# EAGLE board BatebitControllerShield_Sem_LEDs_v0.1.1 (EAGLE 8.2.1)
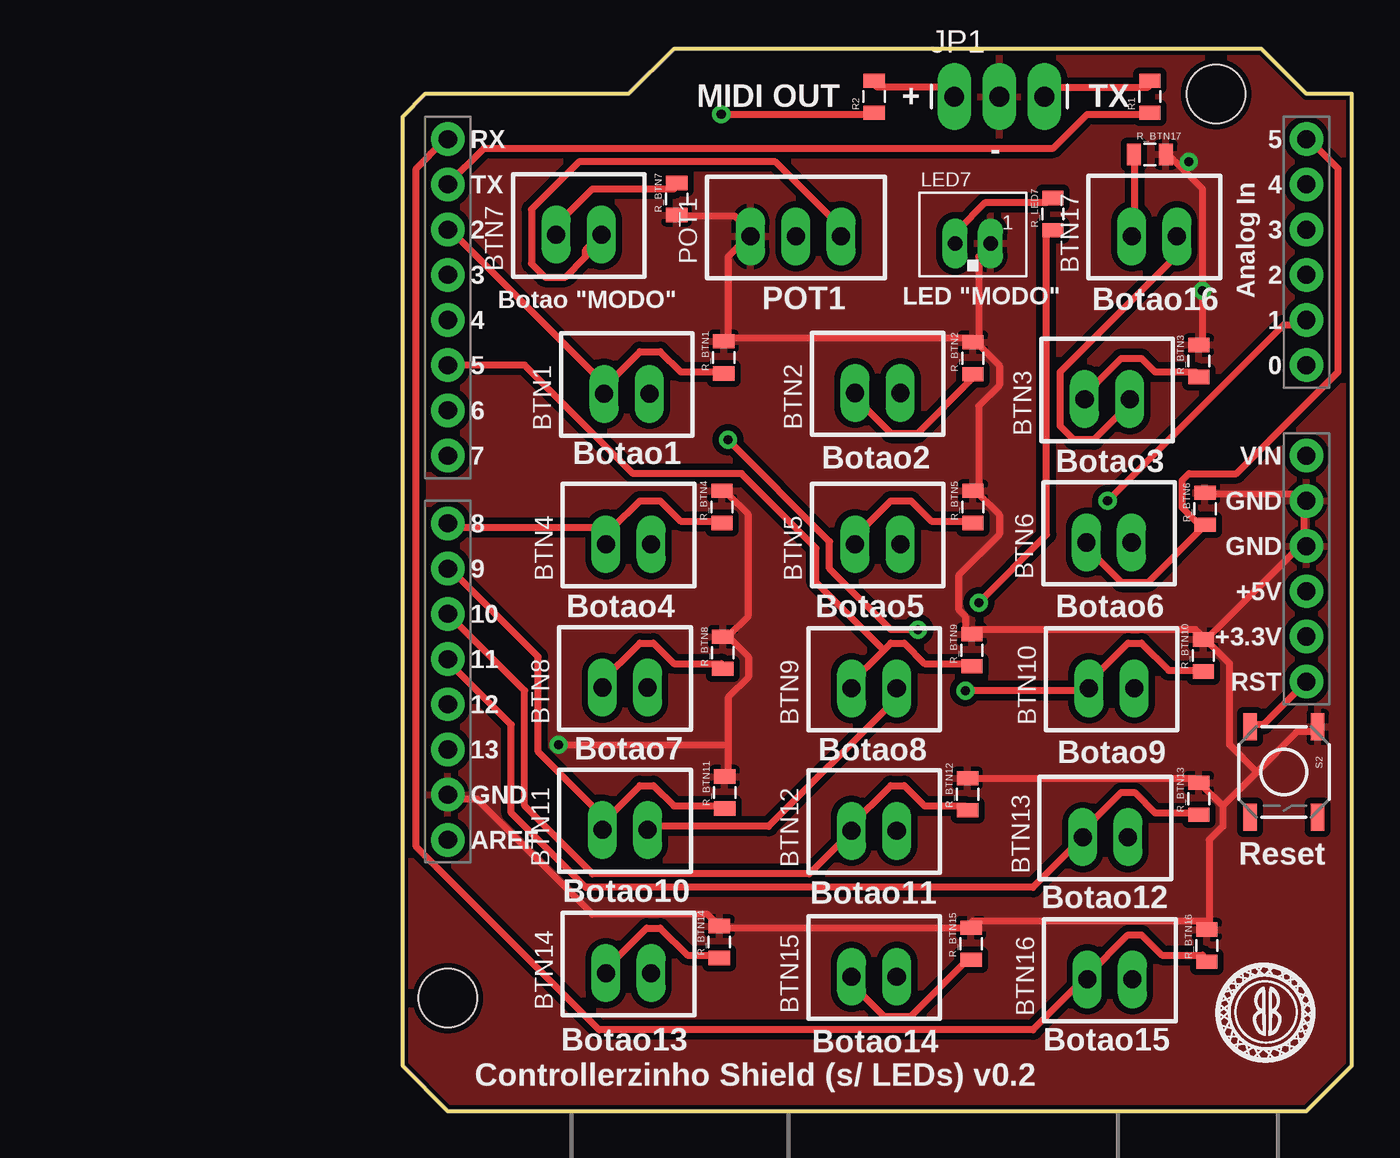
[diagram p0: board, top side]
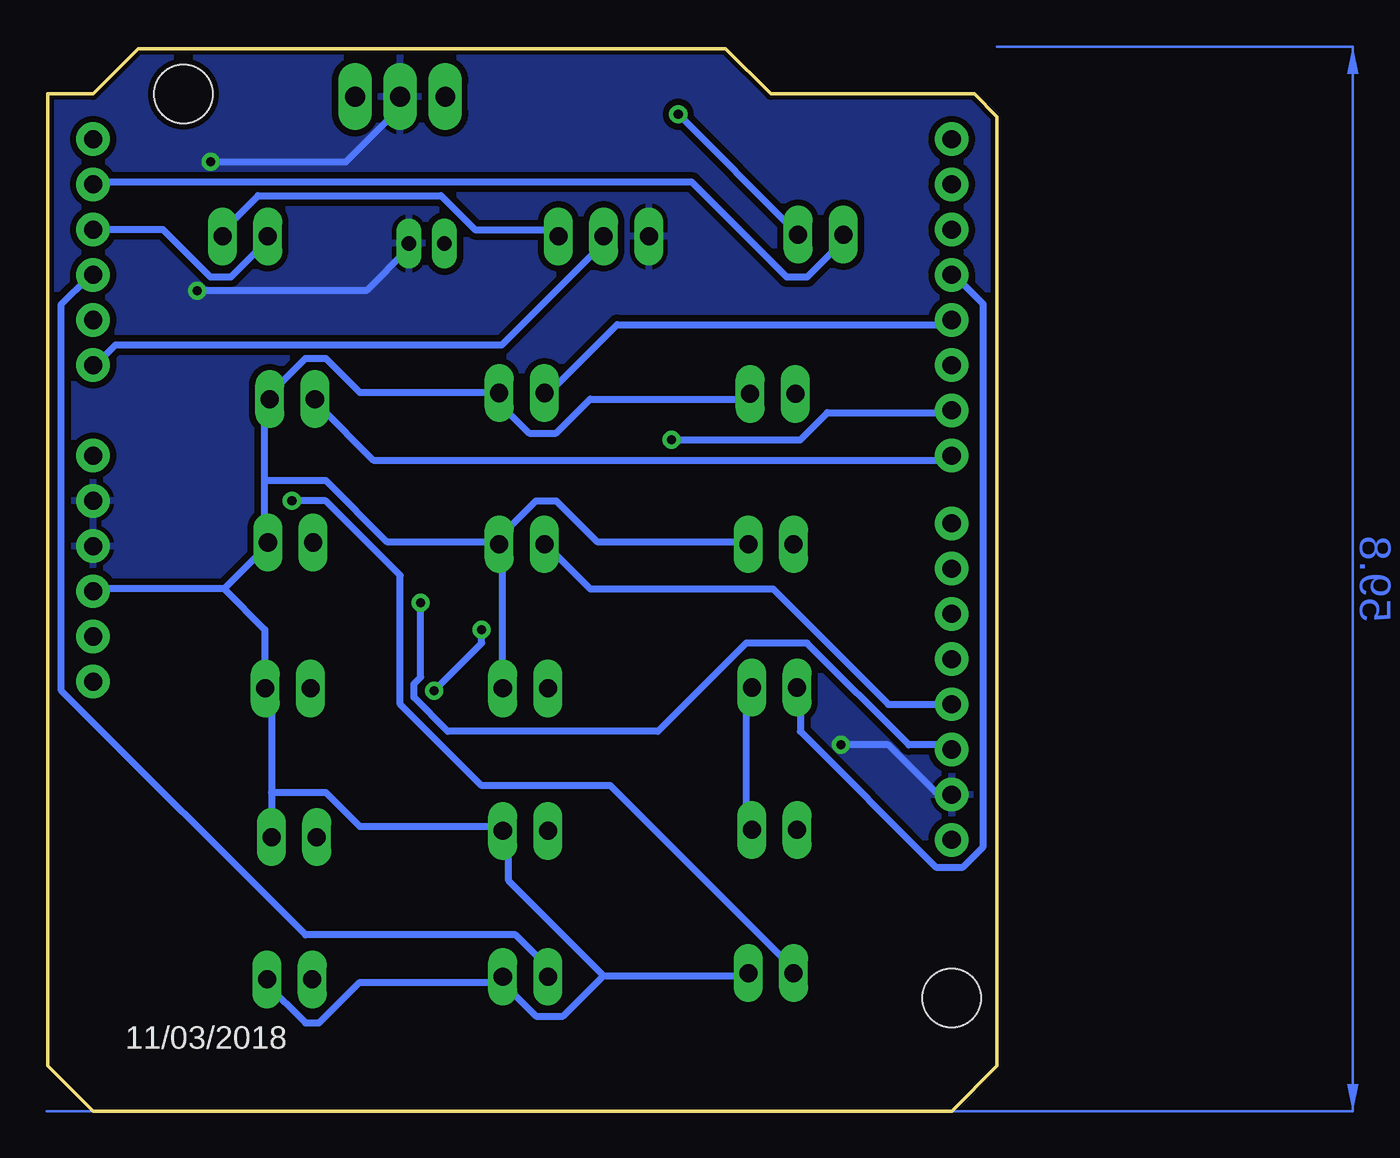
[diagram p1: board, bottom side, seen from below]

Size 53.34 x 59.69 mm. Coordinates in mm from the lower left corner, seen from the top.
Outline: 0,55.88 1.27,57.15 12.7,57.15 15.24,59.69 48.26,59.69 50.8,57.15 53.34,57.15 53.34,2.54 50.8,0 2.54,0 0,2.54 0,55.88
Copper layers (1*16): Top 0.035mm / dielectric 1.5mm / Bottom 0.035mm
Design rules "SparkFun *": minimum track width 8mil, minimum drill 20mil, track to track 8mil, track to pad 8mil, pad to pad 8mil, via to via 8mil, smd to smd 8mil, copper to edge 9mil, drill to drill 7mil, minimum pad ring 12mil, minimum via ring 10mil, stop-mask expansion 4mil, vias tented up to drill 20mil, thermal gap 10mil
Net classes: 0 default: width 0.406 mm, clearance 0.356 mm

## Footprints (pad centres in the part's own frame; a part is rotated, then mirrored left to right if it is on the bottom)
METALTEX-PEMC1-2-PACKAGE-LONG-PAD = drill 1.016 long: 1 -1.27,0; 2 1.27,0
1X03_LONGPADS = drill 1.118 pad 1.88 long: 1 0,0; 2 2.54,0; 3 5.08,0
METALTEX-PHMC4-2-PACKAGE-LONG-PAD = drill 0.8 long: P1 1,-0.5; P2 -1,-0.5
METALTEX-PEMC1-3-PACKAGE-LONG-PAD = drill 1.016 long: 1 -2.54,-0.5; 2 0,-0.5; 3 2.54,-0.5
0805 = smd 0.8 x 1.2: 1 -0.9,0; 2 0.9,0
TACTILE_SWITCH_SMD = smd 1.524 x 0.762: 1 -2.54,1.905; 2 2.54,1.905; 3 -2.54,-1.905; 4 2.54,-1.905
DUEMILANOVE_SHIELD = drill 1.016 pad 1.88: 3.3V 50.8,26.67; 5V 50.8,29.21; A0 50.8,41.91; A1 50.8,44.45; A2 50.8,46.99; A3 50.8,49.53; A4 50.8,52.07; A5 50.8,54.61; AREF 2.54,15.24; D2 2.54,49.53; D3 2.54,46.99; D4 2.54,44.45; D5 2.54,41.91; D6 2.54,39.37; D7 2.54,36.83; D8 2.54,33.02; D9 2.54,30.48; D10 2.54,27.94; D11 2.54,25.4; D12 2.54,22.86; D13 2.54,20.32; GND@0 50.8,31.75; GND@1 50.8,34.29; GND@2 2.54,17.78; RES 50.8,24.13; RX 2.54,54.61; TX 2.54,52.07; VIN 50.8,36.83 | hole 3.302: 45.72,57.15; 2.54,6.35

## Placement (x,y rotation side)
BTN1  METALTEX-PEMC1-2  [METALTEX-PEMC1-2-PACKAGE-LONG-PAD]  12.6,40.3 0 top
BTN2  METALTEX-PEMC1-2  [METALTEX-PEMC1-2-PACKAGE-LONG-PAD]  26.7,40.35 0 top
BTN3  METALTEX-PEMC1-2  [METALTEX-PEMC1-2-PACKAGE-LONG-PAD]  39.6,40 0 top
BTN4  METALTEX-PEMC1-2  [METALTEX-PEMC1-2-PACKAGE-LONG-PAD]  12.7,31.85 0 top
BTN5  METALTEX-PEMC1-2  [METALTEX-PEMC1-2-PACKAGE-LONG-PAD]  26.7,31.85 0 top
BTN6  METALTEX-PEMC1-2  [METALTEX-PEMC1-2-PACKAGE-LONG-PAD]  39.7,31.95 0 top
BTN7  METALTEX-PEMC1-2  [METALTEX-PEMC1-2-PACKAGE-LONG-PAD]  9.9,49.25 0 top
BTN8  METALTEX-PEMC1-2  [METALTEX-PEMC1-2-PACKAGE-LONG-PAD]  12.5,23.8 0 top
BTN9  METALTEX-PEMC1-2  [METALTEX-PEMC1-2-PACKAGE-LONG-PAD]  26.5,23.75 0 top
BTN10  METALTEX-PEMC1-2  [METALTEX-PEMC1-2-PACKAGE-LONG-PAD]  39.85,23.75 0 top
BTN11  METALTEX-PEMC1-2  [METALTEX-PEMC1-2-PACKAGE-LONG-PAD]  12.5,15.8 0 top
BTN12  METALTEX-PEMC1-2  [METALTEX-PEMC1-2-PACKAGE-LONG-PAD]  26.5,15.75 0 top
BTN13  METALTEX-PEMC1-2  [METALTEX-PEMC1-2-PACKAGE-LONG-PAD]  39.5,15.4 0 top
BTN14  METALTEX-PEMC1-2  [METALTEX-PEMC1-2-PACKAGE-LONG-PAD]  12.7,7.75 0 top
BTN15  METALTEX-PEMC1-2  [METALTEX-PEMC1-2-PACKAGE-LONG-PAD]  26.5,7.55 0 top
BTN16  METALTEX-PEMC1-2  [METALTEX-PEMC1-2-PACKAGE-LONG-PAD]  39.75,7.4 0 top
BTN17  METALTEX-PEMC1-2  [METALTEX-PEMC1-2-PACKAGE-LONG-PAD]  42.25,49.15 0 top
JP1  [1X03_LONGPADS]  31,57 0 top
LED7  METALTEX-PHMC4-2  [METALTEX-PHMC4-2-PACKAGE-LONG-PAD]  32.05,49.25 0 top
POT1  METALTEX-PEMC1-3  [METALTEX-PEMC1-3-PACKAGE-LONG-PAD]  22.1,49.65 0 top
R1  [0805]  42,57 90 top
R2  [0805]  26.5,57 90 top
R_BTN1  [0805]  18.05,42.35 90 top
R_BTN2  [0805]  32.05,42.3 90 top
R_BTN3  [0805]  44.75,42.15 90 top
R_BTN4  [0805]  17.95,33.95 90 top
R_BTN5  [0805]  32.05,33.95 90 top
R_BTN6  [0805]  45.1,33.85 90 top
R_BTN7  [0805]  15.4,51.25 90 top
R_BTN8  [0805]  18,25.75 90 top
R_BTN9  [0805]  32,25.9 90 top
R_BTN10  [0805]  45,25.6 90 top
R_BTN11  [0805]  18.1,17.9 90 top
R_BTN12  [0805]  31.75,17.8 90 top
R_BTN13  [0805]  44.75,17.55 90 top
R_BTN14  [0805]  17.8,9.5 90 top
R_BTN15  [0805]  31.95,9.4 90 top
R_BTN16  [0805]  45.2,9.3 90 top
R_BTN17  [0805]  42,53.75 0 top
R_LED7  [0805]  36.55,50.4 90 top
S2  Reset  [TACTILE_SWITCH_SMD]  49.53,19.05 270 top
U2  ARDUINO_SHIELD  [DUEMILANOVE_SHIELD]  0,0 0 top
U$1  BATEBITP  [BATEBIT_BRASAO_P]  45.5,2.5 0 top
U$2  BATEBITMED  [BATEBIT_MED]  26.5,23 0 bottom
U$3  CREATIVE_COMMONS  [CREATIVE_COMMONS]  28.41,25.96 0 top

## Library data of the parts
BTN1-BTN17 JP1 LED7 POT1 R1 R2 R_BTN1-R_BTN17 R_LED7 U$1 U$2 = Batebit
S2 U2 U$3 = SparkFun

## Nets
ARST: S2.3 U2.RES
BTN1: BTN1.1 R_BTN1.1 U2.D2
BTN2: BTN2.1 R_BTN2.1 U2.D4
BTN3: BTN3.1 R_BTN3.1 U2.D7
BTN4: BTN4.1 R_BTN4.1 U2.D8
BTN5: BTN5.1 R_BTN5.1 U2.D12
BTN6: BTN6.1 R_BTN6.1 U2.A5
BTN7: BTN8.1 R_BTN8.1 U2.D3
BTN8: BTN9.1 R_BTN9.1 U2.D5
BTN9: BTN10.1 R_BTN10.1 U2.D6
BTN10: BTN11.1 R_BTN11.1 U2.D9
BTN11: BTN12.1 R_BTN12.1 U2.D10
BTN12: BTN13.1 R_BTN13.1 U2.D11
BTN13: BTN14.1 R_BTN14.1 U2.A1
BTN14: BTN15.1 R_BTN15.1 U2.A2
BTN15: BTN17.1 R_BTN17.1 U2.A3
BTN16: BTN16.1 R_BTN16.1 U2.RX
GND: JP1.2 LED7.P1 POT1.1 R_BTN1.2 R_BTN2.2 R_BTN3.2 R_BTN4.2 R_BTN5.2 R_BTN6.2 R_BTN7.1 R_BTN8.2 R_BTN9.2 R_BTN10.2 R_BTN11.2 R_BTN12.2 R_BTN13.2 R_BTN14.2 R_BTN15.2 R_BTN16.2 R_BTN17.2 S2.1 U2.GND@0 U2.GND@1 U2.GND@2
LED: LED7.P2 R_LED7.2
LED_MODE_BTN: R_LED7.1 U2.D13
MODE_BTN: BTN7.1 R_BTN7.2 U2.A4
N$19: JP1.1 R2.2
N$20: JP1.3 R1.2
N$21: R1.1 U2.TX
POT1: POT1.2 U2.A0
VCC: BTN1.2 BTN2.2 BTN3.2 BTN4.2 BTN5.2 BTN6.2 BTN7.2 BTN8.2 BTN9.2 BTN10.2 BTN11.2 BTN12.2 BTN13.2 BTN14.2 BTN15.2 BTN16.2 BTN17.2 POT1.3 R2.1 U2.5V

## Tracks (layer width: path | path; a pad name or v marks a point on that pad's centre or on a via)
ARST
  Top 0.406: U2.RES 48.39,21.72 47.62,21.72 S2.3
BTN1
  Top 0.406: 11.43,40.77 11.05,40.39 BTN1.1 11.43,40.77 | 11.43,40.77 13.34,42.67 14.48,42.67 15.62,41.53 17.91,41.53 R_BTN1.1 | 11.43,40.77 2.67,49.53 U2.D2
BTN2
  Top 0.406: R_BTN2.1 32,41.15 28.96,38.1 27.43,38.1 25.53,40.01 BTN2.1
  Bottom 0.406: U2.D4 2.67,44.2 21.34,44.2 25.15,40.39 BTN2.1
BTN3
  Top 0.406: R_BTN3.1 44.58,41.53 42.29,41.53 41.53,42.29 40.39,42.29 38.1,40.01 BTN3.1
  Bottom 0.406: U2.D7 2.67,36.58 35.05,36.58 38.1,39.62 BTN3.1
BTN4
  Top 0.406: 11.81,32.77 11.43,32.38 BTN4.1 11.81,32.77 | 11.81,32.77 13.34,34.29 14.48,34.29 15.62,33.15 17.91,33.15 R_BTN4.1 | 11.81,32.77 2.67,32.77 U2.D8
BTN5
  Top 0.406: R_BTN5.1 32,33.15 29.72,33.15 28.57,34.29 27.43,34.29 25.15,32 BTN5.1
  Bottom 0.406: U2.D12 6.1,22.86 12.57,29.34 22.86,29.34 25.15,31.62 BTN5.1
BTN6
  Top 0.406: 44.96,32.77 41.91,29.72 40.39,29.72 38.48,31.62 BTN6.1 | 44.96,32.77 43.81,33.91 43.81,35.43 44.2,35.81 46.86,35.81 52.58,41.53 52.58,52.96 51.05,54.48 U2.A5 | 44.96,32.77 R_BTN6.1
BTN7
  Top 0.406: R_BTN8.1 17.91,25.15 15.24,25.15 14.1,26.29 13.34,26.29 11.05,24 BTN8.1
  Bottom 0.406: U2.D3 2.29,46.86 0.76,45.34 0.76,14.86 1.91,13.72 3.43,13.72 11.05,21.34 11.05,23.62 BTN8.1
BTN8
  Top 0.406: 27.05,25.91 25.15,24 BTN9.1 | 27.05,25.91 27.43,26.29 28.19,26.29 29.34,25.15 31.62,25.15 R_BTN9.1 | U2.D5 6.86,41.91 12.95,35.81 19.05,35.81 23.24,31.62 23.24,29.72 27.05,25.91
BTN9  (via drill 0.51)
  Top 0.406: R_BTN10.1 44.96,24.77 43.05,24.77 41.53,26.29 40.77,26.29 38.48,24 BTN10.1 38.48,23.62 v31.62,23.62 | v18.29,37.72 24,32 24,30.48 27.43,27.05 v28.96,27.05
  Bottom 0.406: v18.29,37.72 11.05,37.72 9.53,39.24 2.67,39.24 U2.D6 | v28.96,27.05 28.96,26.29 v31.62,23.62
BTN10
  Top 0.406: 11.43,16.38 11.05,16 BTN11.1 11.43,16.38 | 11.43,16.38 13.34,18.29 14.1,18.29 15.24,17.14 17.91,17.14 R_BTN11.1 | 11.43,16.38 7.62,20.19 7.62,25.53 2.67,30.48 U2.D9
BTN11
  Top 0.406: R_BTN12.1 31.62,17.14 29.34,17.14 28.19,18.29 27.43,18.29 25.15,16 BTN12.1 25.15,15.62 22.86,13.34 10.67,13.34 6.86,17.14 6.86,23.62 U2.D10
BTN12
  Top 0.406: R_BTN13.1 44.58,16.76 42.29,16.76 41.15,17.91 40.39,17.91 38.1,15.62 BTN13.1 38.1,15.24 35.43,12.57 10.29,12.57 6.1,16.76 6.1,21.72 2.67,25.15 U2.D11
BTN13  (via drill 0.51)
  Top 0.406: R_BTN14.1 17.53,8.76 16,8.76 14.48,10.29 13.72,10.29 11.43,8 BTN14.1 | v39.62,34.29 49.53,44.2 50.67,44.2 U2.A1
  Bottom 0.406: v39.62,34.29 37.72,34.29 33.53,30.1 33.53,22.86 28.96,18.29 21.72,18.29 11.43,8 BTN14.1
BTN14
  Top 0.406: R_BTN15.1 31.62,8.38 28.57,5.33 27.05,5.33 25.15,7.24 BTN15.1
  Bottom 0.406: U2.A2 51.05,46.86 52.58,45.34 52.58,23.62 38.86,9.91 27.05,9.91 25.53,8.38 25.53,7.62 BTN15.1
BTN15
  Top 0.406: R_BTN17.1 41.15,53.72 41.15,49.53 BTN17.1
  Bottom 0.406: U2.A3 46.86,49.53 44.2,46.86 43.05,46.86 40.77,49.15 BTN17.1
BTN16
  Top 0.406: R_BTN16.1 44.96,8.76 42.67,8.76 41.53,9.91 40.77,9.91 38.48,7.62 BTN16.1 38.1,7.24 35.43,4.57 11.05,4.57 0.76,14.86 0.76,52.96 2.29,54.48 U2.RX
GND  (via drill 0.51)
  Top 0.406: 43.81,52.96 43.05,53.72 R_BTN17.2 | 43.81,52.96 44.96,51.82 v44.96,46.1 44.96,43.05 R_BTN3.2 | 43.81,52.96 v44.2,53.34 | R_BTN7.1 15.62,50.29 18.67,50.29 19.43,49.53 POT1.1 19.43,49.15 18.29,48.01 18.29,43.43 | R_BTN2.2 32.38,43.43 32.38,48.01 32.77,48.39 LED7.P1 | R_BTN2.2 32.38,43.05 33.53,41.91 33.53,40.77 32.38,39.62 32.38,35.05 R_BTN5.2 32.38,34.67 33.53,33.53 33.53,32.38 31.24,30.1 31.24,28.19 31.62,27.81 31.62,27.05 R_BTN9.2 32,27.05 44.58,27.05 44.96,26.67 R_BTN10.2 | 18.29,43.43 32,43.43 R_BTN2.2 | 18.29,43.43 R_BTN1.2 | 50.67,34.29 50.29,34.67 45.34,34.67 R_BTN6.2 | 50.67,32 45.34,26.67 R_BTN10.2 | 50.67,32 50.67,34.29 | 50.67,34.29 U2.GND@1 | 50.67,32 U2.GND@0 | 18.29,20.57 18.29,23.24 19.43,24.38 19.43,25.53 18.29,26.67 | 18.29,20.57 18.29,19.05 R_BTN11.2 | 18.29,26.67 19.43,27.81 19.43,33.53 18.29,34.67 R_BTN4.2 | 18.29,26.67 R_BTN8.2 | 45.34,10.67 45.34,15.24 46.1,16 46.1,17.14 | 45.34,10.67 45.34,10.29 R_BTN16.2 | 46.1,17.14 44.96,18.29 R_BTN13.2 44.58,18.67 32,18.67 R_BTN12.2 | 45.34,10.67 32,10.67 R_BTN15.2 31.62,10.29 17.91,10.29 R_BTN14.2 17.53,10.67 17.14,11.05 10.67,11.05 4.19,17.53 2.67,17.53 U2.GND@2 | 46.1,17.14 48.01,19.05 | 48.01,19.05 50.29,21.34 51.44,21.34 S2.1 | v8.76,20.57 18.29,20.57 | 48.01,19.05 46.48,20.57 46.48,25.15 45.34,26.29 R_BTN10.2
  Bottom 0.406: v44.2,53.34 36.58,53.34 33.91,56.01 33.91,56.77 JP1.2 | v44.96,46.1 35.43,46.1 33.15,48.39 LED7.P1 | v8.76,20.57 6.1,20.57 3.43,17.91 2.67,17.91 U2.GND@2
  pour Top: 0,0 0,59.55 53.55,59.55 53.55,0
  pour Bottom: 0,0 0,59.8 53.4,59.8 53.4,0
LED
  Top 0.406: R_LED7.2 36.2,51.05 32.77,51.05 31.24,49.53 31.24,48.77 LED7.P2
LED_MODE_BTN  (via drill 0.51)
  Top 0.406: v32.38,28.57 36.2,32.38 36.2,49.15 R_LED7.1
  Bottom 0.406: v32.38,28.57 32.38,24.38 32.77,24 32.77,23.24 30.86,21.34 19.05,21.34 14.1,26.29 10.67,26.29 4.95,20.57 2.67,20.57 U2.D13
MODE_BTN
  Top 0.406: R_BTN7.2 15.24,51.82 10.67,51.82 8.38,49.53 BTN7.1
  Bottom 0.406: U2.A4 50.67,52.2 17.14,52.2 11.81,46.86 10.67,46.86 8.38,49.15 BTN7.1
N$19
  Top 0.406: R2.2 26.67,57.53 30.48,57.53 30.86,57.15 JP1.1
N$20
  Top 0.406: R1.2 41.91,57.53 36.58,57.53 36.2,57.15 JP1.3
N$21
  Top 0.406: U2.TX 4.57,54.1 36.58,54.1 38.48,56.01 41.91,56.01 R1.1
POT1
  Bottom 0.406: POT1.2 22.48,49.15 22.48,48.39 27.81,43.05 49.53,43.05 50.67,41.91 U2.A0
VCC  (via drill 0.51)
  Top 0.406: BTN11.2 14.1,16 20.57,16 27.43,22.86 27.43,23.62 BTN9.2 | v17.91,56.01 26.29,56.01 R2.1 | BTN17.2 43.43,49.15 43.43,48.01 36.96,41.53 36.96,38.48 37.72,37.72 38.86,37.72 40.77,39.62 BTN3.2 | BTN7.2 11.05,49.15 10.29,48.39 10.29,48.01 9.14,46.86 8,46.86 7.24,47.62 7.24,50.67 9.91,53.34 20.95,53.34 24.77,49.53 POT1.3
  Bottom 0.406: 27.81,7.24 35.81,7.24 38.1,4.95 38.86,4.95 41.15,7.24 BTN16.2 | 22.1,7.62 14.1,7.62 BTN14.2 | 22.1,7.62 24.38,5.33 25.91,5.33 27.81,7.24 | 27.81,7.24 BTN15.2 | 22.1,7.62 27.43,12.95 27.43,15.62 BTN12.2 27.81,16 35.81,16 37.72,17.91 40.77,17.91 | BTN11.2 14.1,16 14.1,23.62 BTN8.2 | 28.19,32 25.91,34.29 24.77,34.29 22.48,32 14.1,32 BTN4.2 | BTN9.2 27.81,24 27.81,31.62 BTN5.2 28.19,32 | v17.91,56.01 11.43,49.53 BTN7.2 | POT1.3 24.77,49.53 29.34,49.53 31.24,51.44 41.53,51.44 43.43,49.53 BTN17.2 | BTN1.2 14.1,40.01 22.86,40.01 24.77,38.1 26.29,38.1 28.19,40.01 BTN2.2 28.19,40.39 35.81,40.39 37.72,42.29 38.86,42.29 41.15,40.01 BTN3.2 41.15,39.62 41.15,35.43 | 40.77,17.91 40.77,23.62 BTN10.2 41.15,24 41.15,27.05 43.43,29.34 | 40.77,17.91 40.77,15.62 BTN13.2 | 41.15,35.43 41.15,32 BTN6.2 41.15,31.62 43.43,29.34 | 43.43,29.34 50.67,29.34 U2.5V | 28.19,32 34.29,32 37.72,35.43 41.15,35.43
(copper drawn outside any net)
  shapes: Bottom area x2

## Text on the board
tPlace: MIDI OUT | + | TX | - | Botao "MODO" | POT1 | LED "MODO" | Botao16 | Botao1 | Botao2 | Botao3 | Botao4 | Botao5 | Botao6 | Botao7 | Botao8 | Botao9 | Reset | Botao10 | Botao11 | Botao12 | Botao13 | Botao14 | Botao15 | Controllerzinho Shield (s/ LEDs) v0.2
bPlace: 11/03/2018